# Altium PCB KUOZHAN.PCBDOC (part 9 of 21)
Units mm, origin at the board's own origin, x right, y up, seen from the top; angles counter-clockwise.
Board outline 165.51 x 116.38 mm, 2 copper layers (Top Layer, Bottom Layer); 171 components, 245 nets, 894 pads, 298 vias.
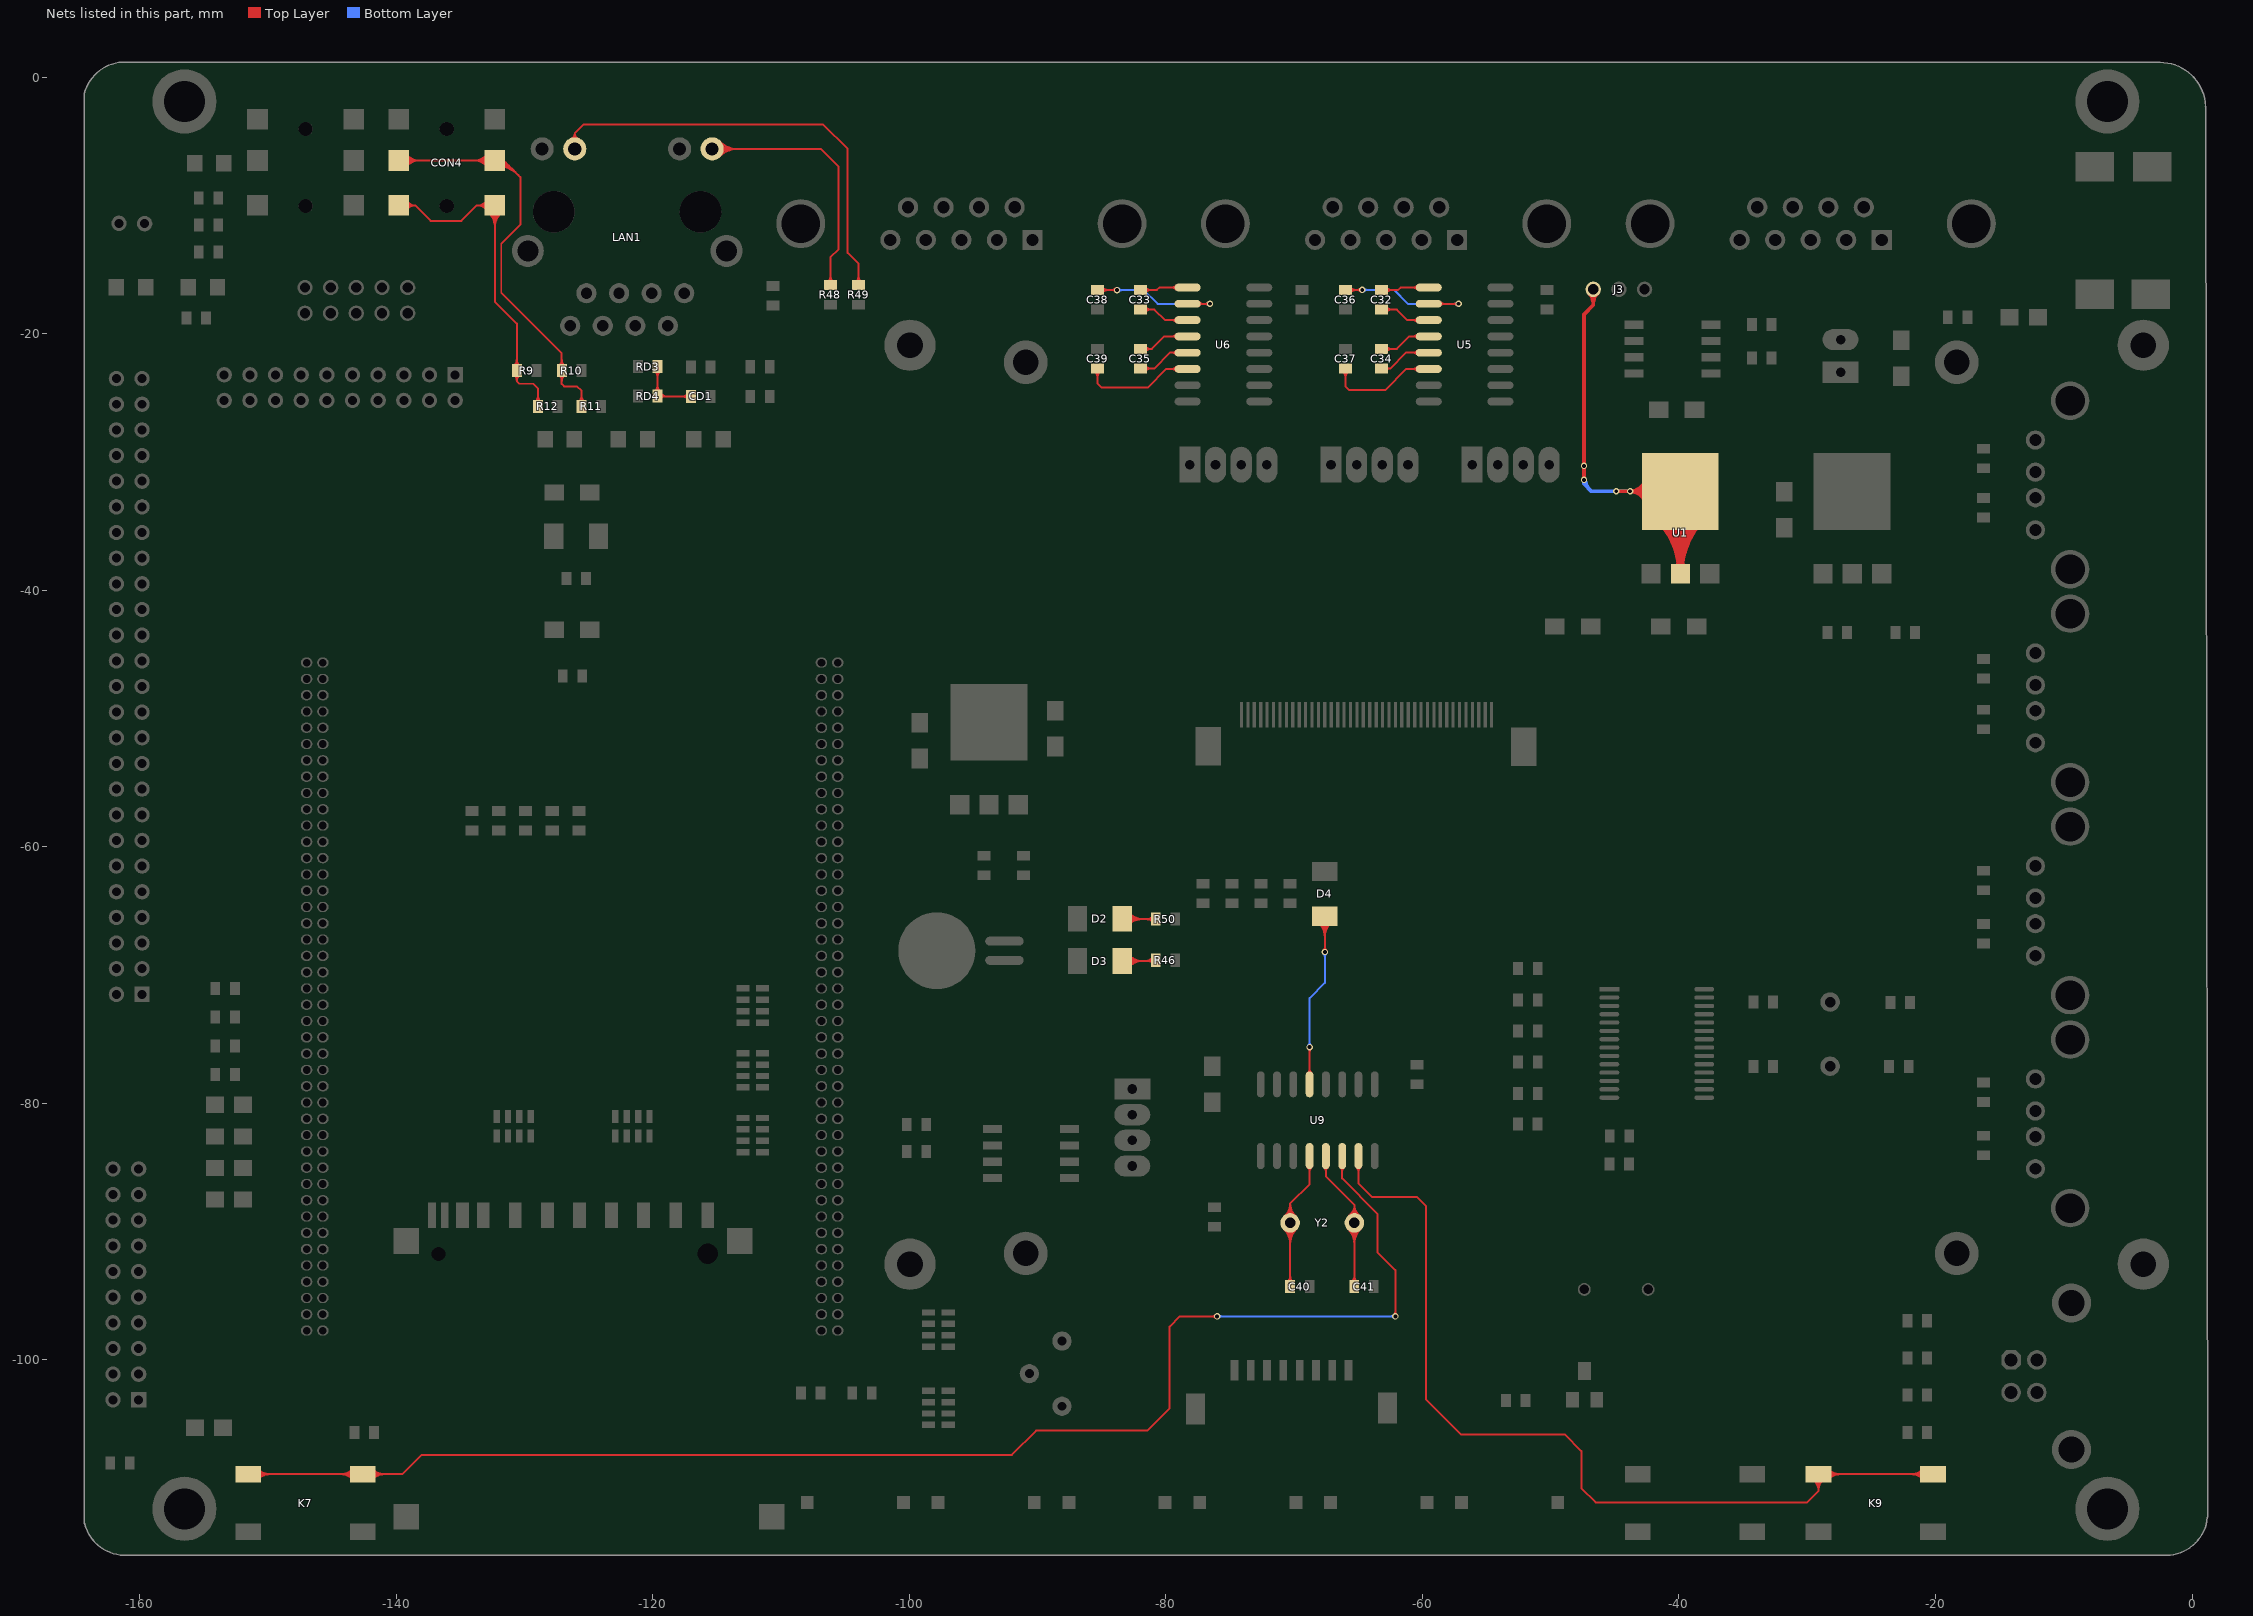
[diagram p9: the nets of this part, all layers, seen from the top]

## Via types
v1: diameter 0.5, hole 0.3, Top Layer to Bottom Layer, 272 vias
v2: diameter 0.6, hole 0.3, Top Layer to Bottom Layer, 24 vias
v3: diameter 0.9, hole 0.9, Top Layer to Bottom Layer, 2 vias

## Nets (pads, with @x,y where several pads share a name; then routed paths per layer and width w, separated by ;. In a path a pad name is that pad's centre, name@x,y a point inside that pad or via, vN(x,y) a via of type N, cw(c..) or ccw(c..) an arc to the next point about the centre after c; other vN are vias at no path point) (continued)
NetC32_1: C32.1 U5.1 | length 13.9
  Top Layer w0.15: C32.1@-63.183,-16.59 -61.89,-16.59 -61.7,-16.4 U5.1@-59.5,-16.4 ; C32.1@-62.84,-16.807 cw(c-62.318,-17.329) -62.318,-16.59 ; C32.1@-62.84,-16.807 cw(c-62.318,-17.329) -62.318,-16.59 ; C32.1@-62.84,-16.807 cw(c-62.318,-17.329) -62.318,-16.59 ; C32.1@-62.84,-16.807 cw(c-62.318,-17.329) -62.318,-16.59 ; C32.1@-62.84,-16.807 cw(c-62.318,-17.329) -62.318,-16.59 ; C32.1@-62.84,-16.374 ccw(c-62.318,-15.851) -62.318,-16.59 ; C32.1@-62.84,-16.374 ccw(c-62.318,-15.851) -62.318,-16.59 ; C32.1@-62.84,-16.374 ccw(c-62.318,-15.851) -62.318,-16.59 ; C32.1@-62.84,-16.374 ccw(c-62.318,-15.851) -62.318,-16.59 ; C32.1@-62.84,-16.374 ccw(c-62.318,-15.851) -62.318,-16.59 ; -60.766,-16.4 cw(c-60.766,-16.955) U5.1@-60.374,-16.562 ; -60.766,-16.4 ccw(c-60.766,-15.845) U5.1@-60.374,-16.238 ; -60.766,-16.4 cw(c-60.766,-16.955) U5.1@-60.374,-16.562 ; -60.766,-16.4 ccw(c-60.766,-15.845) U5.1@-60.374,-16.238 ; -60.766,-16.4 cw(c-60.766,-16.955) U5.1@-60.374,-16.562 ; -60.766,-16.4 ccw(c-60.766,-15.845) U5.1@-60.374,-16.238 ; -60.766,-16.4 cw(c-60.766,-16.955) U5.1@-60.374,-16.562 ; -60.766,-16.4 ccw(c-60.766,-15.845) U5.1@-60.374,-16.238 ; -60.766,-16.4 ccw(c-60.766,-15.845) U5.1@-60.374,-16.238 ; -60.766,-16.4 cw(c-60.766,-16.955) U5.1@-60.374,-16.562
NetC32_2: C32.2 U5.3 | length 14.2
  Top Layer w0.15: C32.2@-63.183,-18.114 -61.986,-18.114 -61.16,-18.94 U5.3@-59.5,-18.94 ; C32.2@-62.84,-18.331 cw(c-62.318,-18.853) -62.318,-18.114 ; C32.2@-62.84,-18.331 cw(c-62.318,-18.853) -62.318,-18.114 ; C32.2@-62.84,-18.331 cw(c-62.318,-18.853) -62.318,-18.114 ; C32.2@-62.84,-18.331 cw(c-62.318,-18.853) -62.318,-18.114 ; C32.2@-62.84,-18.331 cw(c-62.318,-18.853) -62.318,-18.114 ; C32.2@-62.84,-17.898 ccw(c-62.318,-17.375) -62.318,-18.114 ; C32.2@-62.84,-17.898 ccw(c-62.318,-17.375) -62.318,-18.114 ; C32.2@-62.84,-17.898 ccw(c-62.318,-17.375) -62.318,-18.114 ; C32.2@-62.84,-17.898 ccw(c-62.318,-17.375) -62.318,-18.114 ; C32.2@-62.84,-17.898 ccw(c-62.318,-17.375) -62.318,-18.114 ; -60.766,-18.94 cw(c-60.766,-19.495) U5.3@-60.374,-19.102 ; -60.766,-18.94 ccw(c-60.766,-18.385) U5.3@-60.374,-18.778 ; -60.766,-18.94 cw(c-60.766,-19.495) U5.3@-60.374,-19.102 ; -60.766,-18.94 ccw(c-60.766,-18.385) U5.3@-60.374,-18.778 ; -60.766,-18.94 cw(c-60.766,-19.495) U5.3@-60.374,-19.102 ; -60.766,-18.94 ccw(c-60.766,-18.385) U5.3@-60.374,-18.778 ; -60.766,-18.94 cw(c-60.766,-19.495) U5.3@-60.374,-19.102 ; -60.766,-18.94 ccw(c-60.766,-18.385) U5.3@-60.374,-18.778 ; -60.766,-18.94 ccw(c-60.766,-18.385) U5.3@-60.374,-18.778 ; -60.766,-18.94 cw(c-60.766,-19.495) U5.3@-60.374,-19.102
NetC33_1: C33.1 U6.1 | length 13.9
  Top Layer w0.15: C33.1@-81.983,-16.59 -80.69,-16.59 -80.5,-16.4 U6.1@-78.3,-16.4 ; C33.1@-81.64,-16.807 cw(c-81.118,-17.329) -81.118,-16.59 ; C33.1@-81.64,-16.807 cw(c-81.118,-17.329) -81.118,-16.59 ; C33.1@-81.64,-16.807 cw(c-81.118,-17.329) -81.118,-16.59 ; C33.1@-81.64,-16.807 cw(c-81.118,-17.329) -81.118,-16.59 ; C33.1@-81.64,-16.807 cw(c-81.118,-17.329) -81.118,-16.59 ; C33.1@-81.64,-16.374 ccw(c-81.118,-15.851) -81.118,-16.59 ; C33.1@-81.64,-16.374 ccw(c-81.118,-15.851) -81.118,-16.59 ; C33.1@-81.64,-16.374 ccw(c-81.118,-15.851) -81.118,-16.59 ; C33.1@-81.64,-16.374 ccw(c-81.118,-15.851) -81.118,-16.59 ; C33.1@-81.64,-16.374 ccw(c-81.118,-15.851) -81.118,-16.59 ; -79.566,-16.4 cw(c-79.566,-16.955) U6.1@-79.174,-16.562 ; -79.566,-16.4 ccw(c-79.566,-15.845) U6.1@-79.174,-16.238 ; -79.566,-16.4 cw(c-79.566,-16.955) U6.1@-79.174,-16.562 ; -79.566,-16.4 ccw(c-79.566,-15.845) U6.1@-79.174,-16.238 ; -79.566,-16.4 cw(c-79.566,-16.955) U6.1@-79.174,-16.562 ; -79.566,-16.4 ccw(c-79.566,-15.845) U6.1@-79.174,-16.238 ; -79.566,-16.4 cw(c-79.566,-16.955) U6.1@-79.174,-16.562 ; -79.566,-16.4 ccw(c-79.566,-15.845) U6.1@-79.174,-16.238 ; -79.566,-16.4 ccw(c-79.566,-15.845) U6.1@-79.174,-16.238 ; -79.566,-16.4 cw(c-79.566,-16.955) U6.1@-79.174,-16.562
NetC33_2: C33.2 U6.3 | length 14.2
  Top Layer w0.15: C33.2@-81.983,-18.114 -80.886,-18.114 -80.06,-18.94 U6.3@-78.3,-18.94 ; C33.2@-81.64,-18.331 cw(c-81.118,-18.853) -81.118,-18.114 ; C33.2@-81.64,-18.331 cw(c-81.118,-18.853) -81.118,-18.114 ; C33.2@-81.64,-18.331 cw(c-81.118,-18.853) -81.118,-18.114 ; C33.2@-81.64,-18.331 cw(c-81.118,-18.853) -81.118,-18.114 ; C33.2@-81.64,-18.331 cw(c-81.118,-18.853) -81.118,-18.114 ; C33.2@-81.64,-17.898 ccw(c-81.118,-17.375) -81.118,-18.114 ; C33.2@-81.64,-17.898 ccw(c-81.118,-17.375) -81.118,-18.114 ; C33.2@-81.64,-17.898 ccw(c-81.118,-17.375) -81.118,-18.114 ; C33.2@-81.64,-17.898 ccw(c-81.118,-17.375) -81.118,-18.114 ; C33.2@-81.64,-17.898 ccw(c-81.118,-17.375) -81.118,-18.114 ; -79.566,-18.94 cw(c-79.566,-19.495) U6.3@-79.174,-19.102 ; -79.566,-18.94 ccw(c-79.566,-18.385) U6.3@-79.174,-18.778 ; -79.566,-18.94 cw(c-79.566,-19.495) U6.3@-79.174,-19.102 ; -79.566,-18.94 ccw(c-79.566,-18.385) U6.3@-79.174,-18.778 ; -79.566,-18.94 cw(c-79.566,-19.495) U6.3@-79.174,-19.102 ; -79.566,-18.94 ccw(c-79.566,-18.385) U6.3@-79.174,-18.778 ; -79.566,-18.94 cw(c-79.566,-19.495) U6.3@-79.174,-19.102 ; -79.566,-18.94 ccw(c-79.566,-18.385) U6.3@-79.174,-18.778 ; -79.566,-18.94 ccw(c-79.566,-18.385) U6.3@-79.174,-18.778 ; -79.566,-18.94 cw(c-79.566,-19.495) U6.3@-79.174,-19.102
NetC34_1: C34.1 U5.4 | length 14.2
  Top Layer w0.15: C34.1@-63.183,-21.19 -61.99,-21.19 -61.01,-20.21 U5.4@-59.5,-20.21 ; C34.1@-62.84,-21.407 cw(c-62.318,-21.929) -62.318,-21.19 ; C34.1@-62.84,-21.407 cw(c-62.318,-21.929) -62.318,-21.19 ; C34.1@-62.84,-21.407 cw(c-62.318,-21.929) -62.318,-21.19 ; C34.1@-62.84,-21.407 cw(c-62.318,-21.929) -62.318,-21.19 ; C34.1@-62.84,-21.407 cw(c-62.318,-21.929) -62.318,-21.19 ; C34.1@-62.84,-20.974 ccw(c-62.318,-20.451) -62.318,-21.19 ; C34.1@-62.84,-20.974 ccw(c-62.318,-20.451) -62.318,-21.19 ; C34.1@-62.84,-20.974 ccw(c-62.318,-20.451) -62.318,-21.19 ; C34.1@-62.84,-20.974 ccw(c-62.318,-20.451) -62.318,-21.19 ; C34.1@-62.84,-20.974 ccw(c-62.318,-20.451) -62.318,-21.19 ; -60.766,-20.21 cw(c-60.766,-20.765) U5.4@-60.374,-20.372 ; -60.766,-20.21 ccw(c-60.766,-19.655) U5.4@-60.374,-20.048 ; -60.766,-20.21 cw(c-60.766,-20.765) U5.4@-60.374,-20.372 ; -60.766,-20.21 ccw(c-60.766,-19.655) U5.4@-60.374,-20.048 ; -60.766,-20.21 cw(c-60.766,-20.765) U5.4@-60.374,-20.372 ; -60.766,-20.21 ccw(c-60.766,-19.655) U5.4@-60.374,-20.048 ; -60.766,-20.21 cw(c-60.766,-20.765) U5.4@-60.374,-20.372 ; -60.766,-20.21 ccw(c-60.766,-19.655) U5.4@-60.374,-20.048 ; -60.766,-20.21 ccw(c-60.766,-19.655) U5.4@-60.374,-20.048 ; -60.766,-20.21 cw(c-60.766,-20.765) U5.4@-60.374,-20.372
NetC34_2: C34.2 U5.5 | length 11.9
  Top Layer w0.15: C34.2@-63.183,-22.714 -62.514,-22.714 ; U5.5@-59.5,-21.48 -61.28,-21.48 -62.514,-22.714 ; C34.2@-62.794,-22.872 cw(c-62.514,-23.042) -62.514,-22.714 ; C34.2@-62.794,-22.872 cw(c-62.514,-23.042) -62.514,-22.714 ; C34.2@-62.794,-22.872 cw(c-62.514,-23.042) -62.514,-22.714 ; C34.2@-62.794,-22.872 cw(c-62.514,-23.042) -62.514,-22.714 ; C34.2@-62.794,-22.872 cw(c-62.514,-23.042) -62.514,-22.714 ; C34.2@-62.794,-22.556 ccw(c-62.514,-22.387) -62.514,-22.714 ; C34.2@-62.794,-22.556 ccw(c-62.514,-22.387) -62.514,-22.714 ; C34.2@-62.794,-22.556 ccw(c-62.514,-22.387) -62.514,-22.714 ; C34.2@-62.794,-22.556 ccw(c-62.514,-22.387) -62.514,-22.714 ; C34.2@-62.794,-22.556 ccw(c-62.514,-22.387) -62.514,-22.714 ; -60.766,-21.48 cw(c-60.766,-22.035) U5.5@-60.374,-21.642 ; -60.766,-21.48 ccw(c-60.766,-20.925) U5.5@-60.374,-21.318 ; -60.766,-21.48 cw(c-60.766,-22.035) U5.5@-60.374,-21.642 ; -60.766,-21.48 ccw(c-60.766,-20.925) U5.5@-60.374,-21.318 ; -60.766,-21.48 cw(c-60.766,-22.035) U5.5@-60.374,-21.642 ; -60.766,-21.48 ccw(c-60.766,-20.925) U5.5@-60.374,-21.318 ; -60.766,-21.48 cw(c-60.766,-22.035) U5.5@-60.374,-21.642 ; -60.766,-21.48 ccw(c-60.766,-20.925) U5.5@-60.374,-21.318 ; -60.766,-21.48 ccw(c-60.766,-20.925) U5.5@-60.374,-21.318 ; -60.766,-21.48 cw(c-60.766,-22.035) U5.5@-60.374,-21.642
NetC35_1: C35.1 U6.4 | length 14.2
  Top Layer w0.15: C35.1@-81.983,-21.19 -81.09,-21.19 -80.11,-20.21 U6.4@-78.3,-20.21 ; C35.1@-81.64,-21.407 cw(c-81.118,-21.929) -81.118,-21.19 ; C35.1@-81.64,-21.407 cw(c-81.118,-21.929) -81.118,-21.19 ; C35.1@-81.64,-21.407 cw(c-81.118,-21.929) -81.118,-21.19 ; C35.1@-81.64,-21.407 cw(c-81.118,-21.929) -81.118,-21.19 ; C35.1@-81.64,-21.407 cw(c-81.118,-21.929) -81.118,-21.19 ; C35.1@-81.64,-20.974 ccw(c-81.118,-20.451) -81.118,-21.19 ; C35.1@-81.64,-20.974 ccw(c-81.118,-20.451) -81.118,-21.19 ; C35.1@-81.64,-20.974 ccw(c-81.118,-20.451) -81.118,-21.19 ; C35.1@-81.64,-20.974 ccw(c-81.118,-20.451) -81.118,-21.19 ; C35.1@-81.64,-20.974 ccw(c-81.118,-20.451) -81.118,-21.19 ; -79.566,-20.21 cw(c-79.566,-20.765) U6.4@-79.174,-20.372 ; -79.566,-20.21 ccw(c-79.566,-19.655) U6.4@-79.174,-20.048 ; -79.566,-20.21 cw(c-79.566,-20.765) U6.4@-79.174,-20.372 ; -79.566,-20.21 ccw(c-79.566,-19.655) U6.4@-79.174,-20.048 ; -79.566,-20.21 cw(c-79.566,-20.765) U6.4@-79.174,-20.372 ; -79.566,-20.21 ccw(c-79.566,-19.655) U6.4@-79.174,-20.048 ; -79.566,-20.21 cw(c-79.566,-20.765) U6.4@-79.174,-20.372 ; -79.566,-20.21 ccw(c-79.566,-19.655) U6.4@-79.174,-20.048 ; -79.566,-20.21 ccw(c-79.566,-19.655) U6.4@-79.174,-20.048 ; -79.566,-20.21 cw(c-79.566,-20.765) U6.4@-79.174,-20.372
NetC35_2: C35.2 U6.5 | length 14.4
  Top Layer w0.15: C35.2@-81.983,-22.714 -80.914,-22.714 -79.68,-21.48 U6.5@-78.3,-21.48 ; C35.2@-81.64,-22.931 cw(c-81.118,-23.453) -81.118,-22.714 ; C35.2@-81.64,-22.931 cw(c-81.118,-23.453) -81.118,-22.714 ; C35.2@-81.64,-22.931 cw(c-81.118,-23.453) -81.118,-22.714 ; C35.2@-81.64,-22.931 cw(c-81.118,-23.453) -81.118,-22.714 ; C35.2@-81.64,-22.931 cw(c-81.118,-23.453) -81.118,-22.714 ; C35.2@-81.64,-22.498 ccw(c-81.118,-21.975) -81.118,-22.714 ; C35.2@-81.64,-22.498 ccw(c-81.118,-21.975) -81.118,-22.714 ; C35.2@-81.64,-22.498 ccw(c-81.118,-21.975) -81.118,-22.714 ; C35.2@-81.64,-22.498 ccw(c-81.118,-21.975) -81.118,-22.714 ; C35.2@-81.64,-22.498 ccw(c-81.118,-21.975) -81.118,-22.714 ; -79.566,-21.48 cw(c-79.566,-22.035) U6.5@-79.174,-21.642 ; -79.566,-21.48 ccw(c-79.566,-20.925) U6.5@-79.174,-21.318 ; -79.566,-21.48 cw(c-79.566,-22.035) U6.5@-79.174,-21.642 ; -79.566,-21.48 ccw(c-79.566,-20.925) U6.5@-79.174,-21.318 ; -79.566,-21.48 cw(c-79.566,-22.035) U6.5@-79.174,-21.642 ; -79.566,-21.48 ccw(c-79.566,-20.925) U6.5@-79.174,-21.318 ; -79.566,-21.48 cw(c-79.566,-22.035) U6.5@-79.174,-21.642 ; -79.566,-21.48 ccw(c-79.566,-20.925) U6.5@-79.174,-21.318 ; -79.566,-21.48 ccw(c-79.566,-20.925) U6.5@-79.174,-21.318 ; -79.566,-21.48 cw(c-79.566,-22.035) U6.5@-79.174,-21.642
NetC36_1: C36.1 U5.2 | length 34.4
  Top Layer w0.15: C36.1@-65.983,-16.59 v1(-64.69,-16.59) ; v1@-64.779,-16.679 ccw(c-64.992,-16.892) -64.992,-16.59 ccw(c-64.992,-16.288) v1@-64.779,-16.502 ; U5.2@-59.43,-17.6 U5.2@-59.5,-17.67 v1(-57.17,-17.67) ; v1@-57.258,-17.758 ccw(c-57.472,-17.972) -57.472,-17.67 ccw(c-57.472,-17.368) v1@-57.258,-17.582 ; C36.1@-65.64,-16.807 cw(c-65.118,-17.329) -65.118,-16.59 ; C36.1@-65.64,-16.807 cw(c-65.118,-17.329) -65.118,-16.59 ; C36.1@-65.64,-16.807 cw(c-65.118,-17.329) -65.118,-16.59 ; C36.1@-65.64,-16.807 cw(c-65.118,-17.329) -65.118,-16.59 ; C36.1@-65.64,-16.807 cw(c-65.118,-17.329) -65.118,-16.59 ; C36.1@-65.64,-16.374 ccw(c-65.118,-15.851) -65.118,-16.59 ; C36.1@-65.64,-16.374 ccw(c-65.118,-15.851) -65.118,-16.59 ; C36.1@-65.64,-16.374 ccw(c-65.118,-15.851) -65.118,-16.59 ; C36.1@-65.64,-16.374 ccw(c-65.118,-15.851) -65.118,-16.59 ; C36.1@-65.64,-16.374 ccw(c-65.118,-15.851) -65.118,-16.59 ; -65.113,-16.59 cw(c-65.113,-17.013) v1@-64.814,-16.714 ; -65.113,-16.59 ccw(c-65.113,-16.168) v1@-64.814,-16.466 ; -65.113,-16.59 cw(c-65.113,-17.013) v1@-64.814,-16.714 ; -65.113,-16.59 ccw(c-65.113,-16.168) v1@-64.814,-16.466 ; -65.113,-16.59 cw(c-65.113,-17.013) v1@-64.814,-16.714 ; -65.113,-16.59 ccw(c-65.113,-16.168) v1@-64.814,-16.466 ; -65.113,-16.59 ccw(c-65.113,-16.168) v1@-64.814,-16.466 ; -65.113,-16.59 cw(c-65.113,-17.013) v1@-64.814,-16.714 ; U5.2@-58.626,-17.832 cw(c-58.234,-18.225) -58.234,-17.67 ; U5.2@-58.626,-17.832 cw(c-58.234,-18.225) -58.234,-17.67 ; U5.2@-58.626,-17.832 cw(c-58.234,-18.225) -58.234,-17.67 ; U5.2@-58.626,-17.832 cw(c-58.234,-18.225) -58.234,-17.67 ; U5.2@-58.626,-17.832 cw(c-58.234,-18.225) -58.234,-17.67 ; U5.2@-58.626,-17.508 ccw(c-58.234,-17.115) -58.234,-17.67 ; U5.2@-58.626,-17.508 ccw(c-58.234,-17.115) -58.234,-17.67 ; U5.2@-58.626,-17.508 ccw(c-58.234,-17.115) -58.234,-17.67 ; U5.2@-58.626,-17.508 ccw(c-58.234,-17.115) -58.234,-17.67 ; U5.2@-58.626,-17.508 ccw(c-58.234,-17.115) -58.234,-17.67 ; -57.592,-17.67 cw(c-57.592,-18.092) v1@-57.294,-17.794 ; -57.592,-17.67 ccw(c-57.592,-17.248) v1@-57.294,-17.546 ; -57.592,-17.67 cw(c-57.592,-18.092) v1@-57.294,-17.794 ; -57.592,-17.67 ccw(c-57.592,-17.248) v1@-57.294,-17.546 ; -57.592,-17.67 cw(c-57.592,-18.092) v1@-57.294,-17.794 ; -57.592,-17.67 ccw(c-57.592,-17.248) v1@-57.294,-17.546 ; -57.592,-17.67 ccw(c-57.592,-17.248) v1@-57.294,-17.546 ; -57.592,-17.67 cw(c-57.592,-18.092) v1@-57.294,-17.794
  Bottom Layer w0.15: v1(-64.69,-16.59) -62.21,-16.59 -61.13,-17.67 v1(-57.17,-17.67) ; v1@-64.602,-16.679 cw(c-64.388,-16.892) -64.388,-16.59 cw(c-64.388,-16.288) v1@-64.602,-16.502 ; v1@-57.258,-17.758 ccw(c-57.472,-17.972) -57.472,-17.67 ccw(c-57.472,-17.368) v1@-57.258,-17.582 ; v1@-64.566,-16.714 cw(c-64.268,-17.013) -64.268,-16.59 ; v1@-64.566,-16.714 cw(c-64.268,-17.013) -64.268,-16.59 ; v1@-64.566,-16.714 cw(c-64.268,-17.013) -64.268,-16.59 ; v1@-64.566,-16.714 cw(c-64.268,-17.013) -64.268,-16.59 ; v1@-64.566,-16.466 ccw(c-64.268,-16.168) -64.268,-16.59 ; v1@-64.566,-16.466 ccw(c-64.268,-16.168) -64.268,-16.59 ; v1@-64.566,-16.466 ccw(c-64.268,-16.168) -64.268,-16.59 ; v1@-64.566,-16.466 ccw(c-64.268,-16.168) -64.268,-16.59 ; -57.592,-17.67 cw(c-57.592,-18.092) v1@-57.294,-17.794 ; -57.592,-17.67 ccw(c-57.592,-17.248) v1@-57.294,-17.546 ; -57.592,-17.67 cw(c-57.592,-18.092) v1@-57.294,-17.794 ; -57.592,-17.67 ccw(c-57.592,-17.248) v1@-57.294,-17.546 ; -57.592,-17.67 cw(c-57.592,-18.092) v1@-57.294,-17.794 ; -57.592,-17.67 ccw(c-57.592,-17.248) v1@-57.294,-17.546 ; -57.592,-17.67 ccw(c-57.592,-17.248) v1@-57.294,-17.546 ; -57.592,-17.67 cw(c-57.592,-18.092) v1@-57.294,-17.794
NetC37_1: C37.1 U5.6 | length 18.8
  Top Layer w0.15: C37.1@-65.983,-22.72 -65.983,-24.117 -65.7,-24.4 -62.9,-24.4 -61.25,-22.75 U5.6@-59.5,-22.75 ; C37.1@-66.2,-22.937 cw(c-66.722,-23.459) -65.983,-23.459 ; C37.1@-66.2,-22.937 cw(c-66.722,-23.459) -65.983,-23.459 ; C37.1@-66.2,-22.937 cw(c-66.722,-23.459) -65.983,-23.459 ; C37.1@-66.2,-22.937 cw(c-66.722,-23.459) -65.983,-23.459 ; C37.1@-66.2,-22.937 cw(c-66.722,-23.459) -65.983,-23.459 ; -65.983,-23.459 cw(c-65.245,-23.459) C37.1@-65.767,-22.937 ; -65.983,-23.459 cw(c-65.245,-23.459) C37.1@-65.767,-22.937 ; -65.983,-23.459 cw(c-65.245,-23.459) C37.1@-65.767,-22.937 ; -65.983,-23.459 cw(c-65.245,-23.459) C37.1@-65.767,-22.937 ; -65.983,-23.459 cw(c-65.245,-23.459) C37.1@-65.767,-22.937 ; -60.766,-22.75 cw(c-60.766,-23.305) U5.6@-60.374,-22.912 ; -60.766,-22.75 ccw(c-60.766,-22.195) U5.6@-60.374,-22.588 ; -60.766,-22.75 cw(c-60.766,-23.305) U5.6@-60.374,-22.912 ; -60.766,-22.75 ccw(c-60.766,-22.195) U5.6@-60.374,-22.588 ; -60.766,-22.75 cw(c-60.766,-23.305) U5.6@-60.374,-22.912 ; -60.766,-22.75 ccw(c-60.766,-22.195) U5.6@-60.374,-22.588 ; -60.766,-22.75 cw(c-60.766,-23.305) U5.6@-60.374,-22.912 ; -60.766,-22.75 ccw(c-60.766,-22.195) U5.6@-60.374,-22.588 ; -60.766,-22.75 ccw(c-60.766,-22.195) U5.6@-60.374,-22.588 ; -60.766,-22.75 cw(c-60.766,-23.305) U5.6@-60.374,-22.912
NetC38_1: C38.1 U6.2 | length 33.6
  Top Layer w0.15: C38.1@-85.317,-16.59 v1@-83.89,-16.59 ; -84.126,-16.59 cw(c-84.126,-16.926) v1@-83.888,-16.688 ; -84.078,-16.59 ccw(c-84.078,-16.322) v1@-83.888,-16.512 ; U6.2@-78.3,-17.67 v1@-76.53,-17.67 ; v1@-76.638,-17.758 ccw(c-76.852,-17.972) -76.852,-17.67 ccw(c-76.852,-17.368) v1@-76.638,-17.582 ; C38.1@-84.973,-16.807 cw(c-84.451,-17.329) -84.451,-16.59 ; C38.1@-84.973,-16.807 cw(c-84.451,-17.329) -84.451,-16.59 ; C38.1@-84.973,-16.807 cw(c-84.451,-17.329) -84.451,-16.59 ; C38.1@-84.973,-16.807 cw(c-84.451,-17.329) -84.451,-16.59 ; C38.1@-84.973,-16.807 cw(c-84.451,-17.329) -84.451,-16.59 ; C38.1@-84.973,-16.374 ccw(c-84.451,-15.851) -84.451,-16.59 ; C38.1@-84.973,-16.374 ccw(c-84.451,-15.851) -84.451,-16.59 ; C38.1@-84.973,-16.374 ccw(c-84.451,-15.851) -84.451,-16.59 ; C38.1@-84.973,-16.374 ccw(c-84.451,-15.851) -84.451,-16.59 ; C38.1@-84.973,-16.374 ccw(c-84.451,-15.851) -84.451,-16.59 ; -84.246,-16.59 cw(c-84.246,-17.046) v1@-83.924,-16.724 ; -84.246,-16.59 cw(c-84.246,-17.046) v1@-83.924,-16.724 ; -84.246,-16.59 cw(c-84.246,-17.046) v1@-83.924,-16.724 ; -84.246,-16.59 cw(c-84.246,-17.046) v1@-83.924,-16.724 ; -84.199,-16.59 ccw(c-84.199,-16.201) v1@-83.924,-16.476 ; -84.199,-16.59 ccw(c-84.199,-16.201) v1@-83.924,-16.476 ; -84.199,-16.59 ccw(c-84.199,-16.201) v1@-83.924,-16.476 ; -84.199,-16.59 ccw(c-84.199,-16.201) v1@-83.924,-16.476 ; U6.2@-77.426,-17.832 cw(c-77.034,-18.225) -77.034,-17.67 ; U6.2@-77.426,-17.832 cw(c-77.034,-18.225) -77.034,-17.67 ; U6.2@-77.426,-17.832 cw(c-77.034,-18.225) -77.034,-17.67 ; U6.2@-77.426,-17.832 cw(c-77.034,-18.225) -77.034,-17.67 ; U6.2@-77.426,-17.832 cw(c-77.034,-18.225) -77.034,-17.67 ; U6.2@-77.426,-17.508 ccw(c-77.034,-17.115) -77.034,-17.67 ; U6.2@-77.426,-17.508 ccw(c-77.034,-17.115) -77.034,-17.67 ; U6.2@-77.426,-17.508 ccw(c-77.034,-17.115) -77.034,-17.67 ; U6.2@-77.426,-17.508 ccw(c-77.034,-17.115) -77.034,-17.67 ; U6.2@-77.426,-17.508 ccw(c-77.034,-17.115) -77.034,-17.67 ; -76.972,-17.67 cw(c-76.972,-18.092) v1@-76.674,-17.794 ; -76.972,-17.67 ccw(c-76.972,-17.248) v1@-76.674,-17.546 ; -76.972,-17.67 cw(c-76.972,-18.092) v1@-76.674,-17.794 ; -76.972,-17.67 ccw(c-76.972,-17.248) v1@-76.674,-17.546 ; -76.972,-17.67 cw(c-76.972,-18.092) v1@-76.674,-17.794 ; -76.972,-17.67 ccw(c-76.972,-17.248) v1@-76.674,-17.546 ; -76.972,-17.67 ccw(c-76.972,-17.248) v1@-76.674,-17.546 ; -76.972,-17.67 cw(c-76.972,-18.092) v1@-76.674,-17.794
  Bottom Layer w0.15: v1(-83.8,-16.6) -81.7,-16.6 -80.63,-17.67 v1(-76.55,-17.67) ; v1@-83.712,-16.688 cw(c-83.498,-16.902) -83.498,-16.6 cw(c-83.498,-16.298) v1@-83.712,-16.512 ; v1@-76.638,-17.758 ccw(c-76.852,-17.972) -76.852,-17.67 ccw(c-76.852,-17.368) v1@-76.638,-17.582 ; v1@-83.676,-16.724 cw(c-83.378,-17.022) -83.378,-16.6 ; v1@-83.676,-16.724 cw(c-83.378,-17.022) -83.378,-16.6 ; v1@-83.676,-16.724 cw(c-83.378,-17.022) -83.378,-16.6 ; v1@-83.676,-16.724 cw(c-83.378,-17.022) -83.378,-16.6 ; v1@-83.676,-16.476 ccw(c-83.378,-16.178) -83.378,-16.6 ; v1@-83.676,-16.476 ccw(c-83.378,-16.178) -83.378,-16.6 ; v1@-83.676,-16.476 ccw(c-83.378,-16.178) -83.378,-16.6 ; v1@-83.676,-16.476 ccw(c-83.378,-16.178) -83.378,-16.6 ; -76.972,-17.67 cw(c-76.972,-18.092) v1@-76.674,-17.794 ; -76.972,-17.67 ccw(c-76.972,-17.248) v1@-76.674,-17.546 ; -76.972,-17.67 cw(c-76.972,-18.092) v1@-76.674,-17.794 ; -76.972,-17.67 ccw(c-76.972,-17.248) v1@-76.674,-17.546 ; -76.972,-17.67 cw(c-76.972,-18.092) v1@-76.674,-17.794 ; -76.972,-17.67 ccw(c-76.972,-17.248) v1@-76.674,-17.546 ; -76.972,-17.67 ccw(c-76.972,-17.248) v1@-76.674,-17.546 ; -76.972,-17.67 cw(c-76.972,-18.092) v1@-76.674,-17.794
NetC39_1: C39.1 U6.6 | length 19.1
  Top Layer w0.15: C39.1@-85.317,-22.72 -85.317,-23.883 -85,-24.2 -81.4,-24.2 -79.95,-22.75 U6.6@-78.3,-22.75 ; C39.1@-85.533,-22.937 cw(c-86.055,-23.459) -85.317,-23.459 ; C39.1@-85.533,-22.937 cw(c-86.055,-23.459) -85.317,-23.459 ; C39.1@-85.533,-22.937 cw(c-86.055,-23.459) -85.317,-23.459 ; C39.1@-85.533,-22.937 cw(c-86.055,-23.459) -85.317,-23.459 ; C39.1@-85.533,-22.937 cw(c-86.055,-23.459) -85.317,-23.459 ; -85.317,-23.459 cw(c-84.578,-23.459) C39.1@-85.1,-22.937 ; -85.317,-23.459 cw(c-84.578,-23.459) C39.1@-85.1,-22.937 ; -85.317,-23.459 cw(c-84.578,-23.459) C39.1@-85.1,-22.937 ; -85.317,-23.459 cw(c-84.578,-23.459) C39.1@-85.1,-22.937 ; -85.317,-23.459 cw(c-84.578,-23.459) C39.1@-85.1,-22.937 ; -79.566,-22.75 cw(c-79.566,-23.305) U6.6@-79.174,-22.912 ; -79.566,-22.75 ccw(c-79.566,-22.195) U6.6@-79.174,-22.588 ; -79.566,-22.75 cw(c-79.566,-23.305) U6.6@-79.174,-22.912 ; -79.566,-22.75 ccw(c-79.566,-22.195) U6.6@-79.174,-22.588 ; -79.566,-22.75 cw(c-79.566,-23.305) U6.6@-79.174,-22.912 ; -79.566,-22.75 ccw(c-79.566,-22.195) U6.6@-79.174,-22.588 ; -79.566,-22.75 cw(c-79.566,-23.305) U6.6@-79.174,-22.912 ; -79.566,-22.75 ccw(c-79.566,-22.195) U6.6@-79.174,-22.588 ; -79.566,-22.75 ccw(c-79.566,-22.195) U6.6@-79.174,-22.588 ; -79.566,-22.75 cw(c-79.566,-23.305) U6.6@-79.174,-22.912
NetC40_1: C40.1 U9.4 Y2.2 | length 24.5
  Top Layer w0.15: Y2.2@-70.787,-89.794 cw(c-71.96,-90.967) -70.301,-90.967 cw(c-68.643,-90.967) Y2.2@-69.815,-89.794 ; Y2.2@-70.752,-88.79 ccw(c-71.61,-87.801) -70.301,-87.801 ; Y2.2@-70.681,-89.688 cw(c-71.598,-90.605) -70.301,-90.605 cw(c-69.005,-90.605) Y2.2@-69.921,-89.688 ; Y2.2@-70.653,-88.903 ccw(c-71.325,-88.13) -70.301,-88.13 ccw(c-69.278,-88.13) Y2.2@-69.949,-88.903 ; Y2.2@-70.575,-89.582 cw(c-71.236,-90.243) -70.301,-90.243 cw(c-69.367,-90.243) Y2.2@-70.028,-89.582 ; Y2.2@-70.555,-89.016 ccw(c-71.039,-88.459) -70.301,-88.459 ccw(c-69.564,-88.459) Y2.2@-70.047,-89.016 ; C40.1@-70.526,-93.94 ccw(c-71.07,-93.397) -70.301,-93.397 ; C40.1@-70.42,-94.046 ccw(c-70.707,-93.759) -70.301,-93.759 ; C40.1@-70.301,-94.275 Y2.2@-70.301,-89.308 -70.301,-87.801 ; -70.301,-93.439 ccw(c-69.592,-93.439) C40.1@-70.093,-93.94 ; Y2.2@-69.851,-88.79 cw(c-68.992,-87.801) -70.301,-87.801 ; U9.4@-68.952,-84.974 cw(c-69.345,-85.366) -68.79,-85.366 cw(c-68.235,-85.366) U9.4@-68.628,-84.974 ; U9.4@-68.79,-84.1 -68.79,-86.29 -70.301,-87.801
  Top Layer w0.3: C40.1@-70.31,-94.283 C40.1@-70.301,-94.275
NetC41_1: C41.1 U9.5 Y2.1 | length 24.2
  Top Layer w0.15: U9.5@-67.682,-84.974 cw(c-68.075,-85.366) -67.52,-85.366 cw(c-66.965,-85.366) U9.5@-67.358,-84.974 ; U9.5@-67.52,-84.1 -67.52,-85.68 -65.297,-87.903 Y2.1@-65.297,-89.308 C41.1@-65.297,-94.271 ; Y2.1@-65.783,-89.794 cw(c-66.956,-90.967) -65.297,-90.967 cw(c-63.639,-90.967) Y2.1@-64.812,-89.794 ; Y2.1@-65.719,-88.766 ccw(c-66.392,-87.903) -65.297,-87.903 ccw(c-64.203,-87.903) Y2.1@-64.875,-88.766 ; Y2.1@-65.677,-89.688 cw(c-66.594,-90.605) -65.297,-90.605 cw(c-64.001,-90.605) Y2.1@-64.918,-89.688 ; Y2.1@-65.627,-88.884 ccw(c-66.153,-88.21) -65.297,-88.21 ccw(c-64.442,-88.21) Y2.1@-64.968,-88.884 ; Y2.1@-65.571,-89.582 cw(c-66.232,-90.243) -65.297,-90.243 cw(c-64.363,-90.243) Y2.1@-65.024,-89.582 ; Y2.1@-65.535,-89.003 ccw(c-65.914,-88.516) -65.297,-88.516 ccw(c-64.681,-88.516) Y2.1@-65.06,-89.003 ; C41.1@-65.526,-93.94 ccw(c-66.079,-93.388) -65.297,-93.388 ; C41.1@-65.42,-94.046 ccw(c-65.717,-93.75) -65.297,-93.75 ; -65.297,-93.448 ccw(c-64.601,-93.448) C41.1@-65.093,-93.94
  Top Layer w0.3: C41.1@-65.31,-94.283 C41.1@-65.297,-94.271
NetCD1_1: CD1.1 RD3.1 RD4.1 | length 29.9
  Top Layer w0.15: RD4.1@-119.613,-24.86 RD3.1@-119.613,-22.56 ; RD4.1@-119.589,-24.883 CD1.1@-117.01,-24.883 ; RD4.1@-119.829,-24.516 ccw(c-120.351,-23.994) -119.613,-23.994 ; RD4.1@-119.829,-24.516 ccw(c-120.351,-23.994) -119.613,-23.994 ; RD4.1@-119.829,-24.516 ccw(c-120.351,-23.994) -119.613,-23.994 ; RD4.1@-119.829,-24.516 ccw(c-120.351,-23.994) -119.613,-23.994 ; RD4.1@-119.829,-24.516 ccw(c-120.351,-23.994) -119.613,-23.994 ; RD3.1@-119.829,-22.903 cw(c-120.351,-23.425) -119.613,-23.425 ; RD3.1@-119.829,-22.903 cw(c-120.351,-23.425) -119.613,-23.425 ; RD3.1@-119.829,-22.903 cw(c-120.351,-23.425) -119.613,-23.425 ; RD3.1@-119.829,-22.903 cw(c-120.351,-23.425) -119.613,-23.425 ; RD3.1@-119.829,-22.903 cw(c-120.351,-23.425) -119.613,-23.425 ; -119.613,-23.994 ccw(c-118.874,-23.994) RD4.1@-119.396,-24.516 ; -119.613,-23.994 ccw(c-118.874,-23.994) RD4.1@-119.396,-24.516 ; -119.613,-23.994 ccw(c-118.874,-23.994) RD4.1@-119.396,-24.516 ; -119.613,-23.994 ccw(c-118.874,-23.994) RD4.1@-119.396,-24.516 ; -119.613,-23.994 ccw(c-118.874,-23.994) RD4.1@-119.396,-24.516 ; -119.613,-23.425 cw(c-118.874,-23.425) RD3.1@-119.396,-22.903 ; -119.613,-23.425 cw(c-118.874,-23.425) RD3.1@-119.396,-22.903 ; -119.613,-23.425 cw(c-118.874,-23.425) RD3.1@-119.396,-22.903 ; -119.613,-23.425 cw(c-118.874,-23.425) RD3.1@-119.396,-22.903 ; -119.613,-23.425 cw(c-118.874,-23.425) RD3.1@-119.396,-22.903 ; RD4.1@-119.502,-24.749 ccw(c-119.179,-24.426) -119.179,-24.883 ; RD4.1@-119.502,-24.749 ccw(c-119.179,-24.426) -119.179,-24.883 ; RD4.1@-119.502,-24.749 ccw(c-119.179,-24.426) -119.179,-24.883 ; RD4.1@-119.502,-24.749 ccw(c-119.179,-24.426) -119.179,-24.883 ; RD4.1@-119.502,-24.749 ccw(c-119.179,-24.426) -119.179,-24.883 ; RD4.1@-119.396,-25.076 cw(c-118.931,-25.541) -118.931,-24.883 ; RD4.1@-119.396,-25.076 cw(c-118.931,-25.541) -118.931,-24.883 ; RD4.1@-119.396,-25.076 cw(c-118.931,-25.541) -118.931,-24.883 ; RD4.1@-119.396,-25.076 cw(c-118.931,-25.541) -118.931,-24.883 ; RD4.1@-119.396,-25.076 cw(c-118.931,-25.541) -118.931,-24.883 ; RD4.1@-119.396,-24.643 ccw(c-118.816,-24.063) -118.816,-24.883 ; RD4.1@-119.396,-24.643 ccw(c-118.816,-24.063) -118.816,-24.883 ; RD4.1@-119.396,-24.643 ccw(c-118.816,-24.063) -118.816,-24.883 ; RD4.1@-119.396,-24.643 ccw(c-118.816,-24.063) -118.816,-24.883 ; RD4.1@-119.396,-24.643 ccw(c-118.816,-24.063) -118.816,-24.883 ; -117.749,-24.883 cw(c-117.749,-25.622) CD1.1@-117.226,-25.1 ; -117.749,-24.883 ccw(c-117.749,-24.145) CD1.1@-117.226,-24.667 ; -117.749,-24.883 cw(c-117.749,-25.622) CD1.1@-117.226,-25.1 ; -117.749,-24.883 ccw(c-117.749,-24.145) CD1.1@-117.226,-24.667 ; -117.749,-24.883 cw(c-117.749,-25.622) CD1.1@-117.226,-25.1 ; -117.749,-24.883 ccw(c-117.749,-24.145) CD1.1@-117.226,-24.667 ; -117.749,-24.883 cw(c-117.749,-25.622) CD1.1@-117.226,-25.1 ; -117.749,-24.883 ccw(c-117.749,-24.145) CD1.1@-117.226,-24.667 ; -117.749,-24.883 ccw(c-117.749,-24.145) CD1.1@-117.226,-24.667 ; -117.749,-24.883 cw(c-117.749,-25.622) CD1.1@-117.226,-25.1
NetCON4_3: CON4.3 CON4.4 R10.1 R11.2 | length 70.3
  Top Layer w0.15: CON4.3@-139.8,-6.5 CON4.4@-132.292,-6.5 -131.6,-6.5 -130.3,-7.8 -130.3,-11.5 -131.8,-13 -131.8,-16.8 -127.087,-21.513 -127.087,-22.84 -127.087,-23.913 -126.9,-24.1 -125.9,-24.1 -125.537,-24.463 R11.2@-125.537,-25.66 ; CON4.3@-139.499,-6.801 cw(c-138.774,-7.526) -138.774,-6.5 cw(c-138.774,-5.474) CON4.3@-139.499,-6.199 ; CON4.3@-139.393,-6.907 cw(c-138.412,-7.888) -138.412,-6.5 cw(c-138.412,-5.112) CON4.3@-139.393,-6.093 ; CON4.3@-139.287,-7.013 cw(c-138.05,-8.25) -138.05,-6.5 cw(c-138.05,-4.75) CON4.3@-139.287,-5.987 ; CON4.4@-132.805,-7.013 ccw(c-134.042,-8.25) -134.042,-6.5 ccw(c-134.042,-4.75) CON4.4@-132.805,-5.987 ; CON4.4@-132.699,-6.907 ccw(c-133.68,-7.888) -133.68,-6.5 ccw(c-133.68,-5.112) CON4.4@-132.699,-6.093 ; CON4.4@-132.593,-6.801 ccw(c-133.318,-7.526) -133.318,-6.5 ccw(c-133.318,-5.474) CON4.4@-132.593,-6.199 ; CON4.4@-132.297,-6.325 cw(c-132.263,-7.503) -131.43,-6.67 ; CON4.4@-132.293,-6.475 cw(c-132.25,-7.981) -131.184,-6.916 ; CON4.4@-132.288,-6.625 cw(c-132.236,-8.459) -130.938,-7.162 ; CON4.4@-132.284,-6.775 cw(c-132.222,-8.938) -130.692,-7.408 ; CON4.4@-132.28,-6.925 cw(c-132.209,-9.416) -130.446,-7.654 ; R10.1@-127.291,-23.224 cw(c-127.783,-23.716) -127.087,-23.716 ; R10.1@-127.291,-22.537 ccw(c-127.783,-22.045) -127.087,-22.045 ; -127.087,-23.777 cw(c-126.306,-23.777) R10.1@-126.858,-23.224 ; -127.087,-23.415 cw(c-126.668,-23.415) R10.1@-126.964,-23.118 ; -127.087,-22.347 ccw(c-126.668,-22.347) R10.1@-126.964,-22.643 ; -127.087,-21.985 ccw(c-126.306,-21.985) R10.1@-126.858,-22.537 ; R10.1@-127.304,-23.184 cw(c-127.826,-23.706) -127.087,-23.706 ; R10.1@-127.304,-23.184 cw(c-127.826,-23.706) -127.087,-23.706 ; R10.1@-127.304,-23.184 cw(c-127.826,-23.706) -127.087,-23.706 ; R10.1@-127.304,-23.184 cw(c-127.826,-23.706) -127.087,-23.706 ; R10.1@-127.304,-22.497 ccw(c-127.826,-21.975) -127.087,-21.975 ; R10.1@-127.304,-22.497 ccw(c-127.826,-21.975) -127.087,-21.975 ; R10.1@-127.304,-22.497 ccw(c-127.826,-21.975) -127.087,-21.975 ; R10.1@-127.304,-22.497 ccw(c-127.826,-21.975) -127.087,-21.975 ; -127.087,-23.706 cw(c-126.349,-23.706) R10.1@-126.871,-23.184 ; -127.087,-23.706 cw(c-126.349,-23.706) R10.1@-126.871,-23.184 ; -127.087,-23.706 cw(c-126.349,-23.706) R10.1@-126.871,-23.184 ; -127.087,-23.706 cw(c-126.349,-23.706) R10.1@-126.871,-23.184 ; -127.087,-21.975 ccw(c-126.349,-21.975) R10.1@-126.871,-22.497 ; -127.087,-21.975 ccw(c-126.349,-21.975) R10.1@-126.871,-22.497 ; -127.087,-21.975 ccw(c-126.349,-21.975) R10.1@-126.871,-22.497 ; -127.087,-21.975 ccw(c-126.349,-21.975) R10.1@-126.871,-22.497 ; R11.2@-125.753,-25.316 ccw(c-126.275,-24.794) -125.537,-24.794 ; R11.2@-125.753,-25.316 ccw(c-126.275,-24.794) -125.537,-24.794 ; R11.2@-125.753,-25.316 ccw(c-126.275,-24.794) -125.537,-24.794 ; R11.2@-125.753,-25.316 ccw(c-126.275,-24.794) -125.537,-24.794 ; R11.2@-125.753,-25.316 ccw(c-126.275,-24.794) -125.537,-24.794 ; -125.537,-24.794 ccw(c-124.798,-24.794) R11.2@-125.32,-25.316 ; -125.537,-24.794 ccw(c-124.798,-24.794) R11.2@-125.32,-25.316 ; -125.537,-24.794 ccw(c-124.798,-24.794) R11.2@-125.32,-25.316 ; -125.537,-24.794 ccw(c-124.798,-24.794) R11.2@-125.32,-25.316 ; -125.537,-24.794 ccw(c-124.798,-24.794) R11.2@-125.32,-25.316
NetCON4_5: CON4.5 CON4.6 R9.1 R12.2 | length 57.3
  Top Layer w0.15: CON4.5@-139.8,-10 -138.5,-10 ; CON4.5@-139.311,-10.302 cw(c-138.769,-10.637) -138.769,-10 cw(c-138.769,-9.363) CON4.5@-139.311,-9.698 ; CON4.5@-139.183,-10.381 cw(c-138.5,-10.803) -138.5,-10 ; CON4.5@-139.183,-9.619 ccw(c-138.5,-9.197) -138.5,-10 ; CON4.6@-132.882,-10.421 ccw(c-133.7,-11.005) -133.7,-10 ; CON4.6@-132.882,-9.579 cw(c-133.7,-8.995) -133.7,-10 ; CON4.6@-132.805,-10.513 cw(c-134.042,-11.75) -132.292,-11.75 cw(c-130.542,-11.75) CON4.6@-131.779,-10.513 ; CON4.6@-132.76,-10.334 ccw(c-133.409,-10.797) -133.409,-10 ccw(c-133.409,-9.203) CON4.6@-132.76,-9.666 ; CON4.6@-132.699,-10.407 cw(c-133.68,-11.388) -132.292,-11.388 cw(c-130.904,-11.388) CON4.6@-131.885,-10.407 ; CON4.6@-132.638,-10.247 ccw(c-133.117,-10.589) -133.117,-10 ccw(c-133.117,-9.411) CON4.6@-132.638,-9.753 ; CON4.6@-132.593,-10.301 cw(c-133.318,-11.026) -132.292,-11.026 cw(c-131.266,-11.026) CON4.6@-131.991,-10.301 ; CON4.6@-132.292,-10.6 -132.292,-17.508 -130.587,-19.213 -130.587,-22.84 -130.587,-23.713 ; CON4.6@-132.292,-10 -133.7,-10 ; R9.1@-130.791,-22.537 ccw(c-131.283,-22.045) -130.587,-22.045 ; R9.1@-130.79,-23.225 cw(c-131.275,-23.713) -130.587,-23.713 ; -130.587,-22.347 ccw(c-130.168,-22.347) R9.1@-130.464,-22.643 ; -130.587,-21.985 ccw(c-129.806,-21.985) R9.1@-130.358,-22.537 ; R9.1@-130.373,-23.237 ccw(c-129.954,-23.713) -130.587,-23.713 ; R12.2@-128.937,-25.66 -128.937,-24.263 -129.3,-23.9 -130.4,-23.9 -130.587,-23.713 ; -138.5,-10 -137.3,-11.2 -134.9,-11.2 -133.7,-10 ; R9.1@-130.804,-23.184 cw(c-131.326,-23.706) -130.587,-23.706 ; R9.1@-130.804,-23.184 cw(c-131.326,-23.706) -130.587,-23.706 ; R9.1@-130.804,-23.184 cw(c-131.326,-23.706) -130.587,-23.706 ; R9.1@-130.804,-23.184 cw(c-131.326,-23.706) -130.587,-23.706 ; R9.1@-130.804,-22.497 ccw(c-131.326,-21.975) -130.587,-21.975 ; R9.1@-130.804,-22.497 ccw(c-131.326,-21.975) -130.587,-21.975 ; R9.1@-130.804,-22.497 ccw(c-131.326,-21.975) -130.587,-21.975 ; R9.1@-130.804,-22.497 ccw(c-131.326,-21.975) -130.587,-21.975 ; -130.587,-23.706 cw(c-129.849,-23.706) R9.1@-130.371,-23.184 ; -130.587,-23.706 cw(c-129.849,-23.706) R9.1@-130.371,-23.184 ; -130.587,-23.706 cw(c-129.849,-23.706) R9.1@-130.371,-23.184 ; -130.587,-23.706 cw(c-129.849,-23.706) R9.1@-130.371,-23.184 ; -130.587,-21.975 ccw(c-129.849,-21.975) R9.1@-130.371,-22.497 ; -130.587,-21.975 ccw(c-129.849,-21.975) R9.1@-130.371,-22.497 ; -130.587,-21.975 ccw(c-129.849,-21.975) R9.1@-130.371,-22.497 ; -130.587,-21.975 ccw(c-129.849,-21.975) R9.1@-130.371,-22.497 ; R12.2@-129.153,-25.316 ccw(c-129.675,-24.794) -128.937,-24.794 ; R12.2@-129.153,-25.316 ccw(c-129.675,-24.794) -128.937,-24.794 ; R12.2@-129.153,-25.316 ccw(c-129.675,-24.794) -128.937,-24.794 ; R12.2@-129.153,-25.316 ccw(c-129.675,-24.794) -128.937,-24.794 ; R12.2@-129.153,-25.316 ccw(c-129.675,-24.794) -128.937,-24.794 ; -128.937,-24.794 ccw(c-128.198,-24.794) R12.2@-128.72,-25.316 ; -128.937,-24.794 ccw(c-128.198,-24.794) R12.2@-128.72,-25.316 ; -128.937,-24.794 ccw(c-128.198,-24.794) R12.2@-128.72,-25.316 ; -128.937,-24.794 ccw(c-128.198,-24.794) R12.2@-128.72,-25.316 ; -128.937,-24.794 ccw(c-128.198,-24.794) R12.2@-128.72,-25.316
NetD2_1: D2.1 R50.1 | length 9.7
  Top Layer w0.15: D2.1@-83.385,-65.601 -83.346,-65.64 R50.1@-80.787,-65.64 ; D2.1@-83.12,-65.866 cw(c-82.576,-66.41) -82.576,-65.64 ; D2.1@-83.12,-65.335 ccw(c-82.384,-64.599) -82.384,-65.64 ; D2.1@-83.014,-65.972 cw(c-82.214,-66.772) -82.214,-65.64 ; D2.1@-83.014,-65.229 ccw(c-82.022,-64.237) -82.022,-65.64 ; D2.1@-82.908,-66.078 cw(c-81.852,-67.134) -81.852,-65.64 ; D2.1@-82.908,-65.123 ccw(c-81.66,-63.875) -81.66,-65.64 ; R50.1@-81.004,-65.857 ccw(c-81.526,-66.379) -81.526,-65.64 ccw(c-81.526,-64.902) R50.1@-81.004,-65.424
NetD3_2: D3.2 R46.1 | length 10.2
  Top Layer w0.15: D3.2@-83.385,-68.899 -80.846,-68.899 R46.1@-80.787,-68.84 ; D3.2@-83.12,-69.165 cw(c-82.48,-69.805) -82.48,-68.899 cw(c-82.48,-67.994) D3.2@-83.12,-68.634 ; D3.2@-83.014,-69.271 cw(c-82.118,-70.167) -82.118,-68.899 cw(c-82.118,-67.632) D3.2@-83.014,-68.528 ; D3.2@-82.908,-69.377 cw(c-81.756,-70.529) -81.756,-68.899 cw(c-81.756,-67.27) D3.2@-82.908,-68.422 ; -81.669,-68.899 ccw(c-81.669,-67.959) R46.1@-81.004,-68.624 ; -81.384,-68.899 cw(c-81.384,-69.437) R46.1@-81.004,-69.057 ; -81.306,-68.899 ccw(c-81.306,-68.321) R46.1@-80.898,-68.73
NetD4_2: D4.2 U9.13 | length 23.2
  Top Layer w0.15: U9.13@-68.952,-77.638 ccw(c-69.345,-77.246) -68.79,-77.246 ccw(c-68.235,-77.246) U9.13@-68.628,-77.638 ; v1@-68.914,-75.734 cw(c-69.212,-76.032) -68.79,-76.032 cw(c-68.368,-76.032) v1@-68.666,-75.734 ; U9.13@-68.79,-78.512 v1(-68.79,-75.61) ; D4.2@-68.077,-65.892 cw(c-69.229,-67.044) -67.599,-67.044 cw(c-65.97,-67.044) D4.2@-67.122,-65.892 ; D4.2@-67.971,-65.786 cw(c-68.867,-66.682) -67.599,-66.682 cw(c-66.332,-66.682) D4.2@-67.228,-65.786 ; D4.2@-67.865,-65.68 cw(c-68.505,-66.32) -67.599,-66.32 cw(c-66.694,-66.32) D4.2@-67.334,-65.68 ; v1@-67.723,-68.076 ccw(c-68.022,-67.778) -67.599,-67.778 ccw(c-67.177,-67.778) v1@-67.476,-68.076 ; v1@-67.599,-68.299 D4.2@-67.599,-65.415
  Bottom Layer w0.15: v1@-68.914,-75.486 ccw(c-69.212,-75.188) -68.79,-75.188 ccw(c-68.368,-75.188) v1@-68.666,-75.486 ; v1(-68.79,-75.61) -68.79,-71.79 -67.599,-70.599 v1(-67.599,-68.2) ; v1@-67.723,-68.324 cw(c-68.022,-68.622) -67.599,-68.622 cw(c-67.177,-68.622) v1@-67.476,-68.324
NetJ3_1: J3.1 U1.3 U1.4 | length 217.5
  Top Layer w0.3: v1(-47.4,-31.4) v1(-47.4,-30.3) -47.4,-18.5 -46.677,-17.777 J3.1@-46.677,-16.545 ; v1(-44.887,-32.287) v1(-43.8,-32.287) ; U1.4@-39.897,-32.287 v1(-43.8,-32.287) ; J3.1@-46.995,-16.864 cw(c-47.763,-17.632) -46.677,-17.632 ; J3.1@-46.995,-16.864 cw(c-47.763,-17.632) -46.677,-17.632 ; J3.1@-46.995,-16.864 cw(c-47.763,-17.632) -46.677,-17.632 ; J3.1@-46.995,-16.864 cw(c-47.763,-17.632) -46.677,-17.632 ; J3.1@-46.995,-16.864 cw(c-47.763,-17.632) -46.677,-17.632 ; -46.677,-17.632 cw(c-45.59,-17.632) J3.1@-46.358,-16.864 ; -46.677,-17.632 cw(c-45.59,-17.632) J3.1@-46.358,-16.864 ; -46.677,-17.632 cw(c-45.59,-17.632) J3.1@-46.358,-16.864 ; -46.677,-17.632 cw(c-45.59,-17.632) J3.1@-46.358,-16.864 ; -46.677,-17.632 cw(c-45.59,-17.632) J3.1@-46.358,-16.864 ; v1(-43.8,-32.287) cw(c-43.8,-33.535) U1.4@-42.611,-33.155 ; v1(-43.8,-32.287) ccw(c-43.8,-31.039) U1.4@-42.611,-31.419 ; v1(-43.8,-32.287) cw(c-43.8,-33.535) U1.4@-42.611,-33.155 ; v1(-43.8,-32.287) ccw(c-43.8,-31.039) U1.4@-42.611,-31.419 ; v1(-43.8,-32.287) cw(c-43.8,-33.535) U1.4@-42.611,-33.155 ; v1(-43.8,-32.287) ccw(c-43.8,-31.039) U1.4@-42.611,-31.419 ; v1(-43.8,-32.287) cw(c-43.8,-33.535) U1.4@-42.611,-33.155 ; v1(-43.8,-32.287) ccw(c-43.8,-31.039) U1.4@-42.611,-31.419 ; v1(-43.8,-32.287) ccw(c-43.8,-31.039) U1.4@-42.611,-31.419 ; v1(-43.8,-32.287) cw(c-43.8,-33.535) U1.4@-42.611,-33.155 ; -43.389,-32.287 cw(c-43.389,-33.403) U1.4@-42.326,-33.063 ; -43.389,-32.287 ccw(c-43.389,-31.171) U1.4@-42.326,-31.511 ; -43.389,-32.287 cw(c-43.389,-33.403) U1.4@-42.326,-33.063 ; -43.389,-32.287 ccw(c-43.389,-31.171) U1.4@-42.326,-31.511 ; -43.389,-32.287 cw(c-43.389,-33.403) U1.4@-42.326,-33.063 ; -43.389,-32.287 ccw(c-43.389,-31.171) U1.4@-42.326,-31.511 ; -43.389,-32.287 cw(c-43.389,-33.403) U1.4@-42.326,-33.063 ; -43.389,-32.287 ccw(c-43.389,-31.171) U1.4@-42.326,-31.511 ; -43.389,-32.287 ccw(c-43.389,-31.171) U1.4@-42.326,-31.511 ; -43.389,-32.287 cw(c-43.389,-33.403) U1.4@-42.326,-33.063 ; -42.978,-32.287 cw(c-42.978,-33.272) U1.4@-42.04,-32.972 ; -42.978,-32.287 ccw(c-42.978,-31.302) U1.4@-42.04,-31.602 ; -42.978,-32.287 cw(c-42.978,-33.272) U1.4@-42.04,-32.972 ; -42.978,-32.287 ccw(c-42.978,-31.302) U1.4@-42.04,-31.602 ; -42.978,-32.287 cw(c-42.978,-33.272) U1.4@-42.04,-32.972 ; -42.978,-32.287 ccw(c-42.978,-31.302) U1.4@-42.04,-31.602 ; -42.978,-32.287 cw(c-42.978,-33.272) U1.4@-42.04,-32.972 ; -42.978,-32.287 ccw(c-42.978,-31.302) U1.4@-42.04,-31.602 ; -42.978,-32.287 ccw(c-42.978,-31.302) U1.4@-42.04,-31.602 ; -42.978,-32.287 cw(c-42.978,-33.272) U1.4@-42.04,-32.972
  Top Layer w0.5: U1.3@-39.883,-38.712 U1.4@-39.883,-32.301 ; U1.4@-41.788,-34.284 cw(c-45.982,-38.712) U1.3@-39.883,-38.712 ; U1.4@-41.788,-34.284 cw(c-45.982,-38.712) U1.3@-39.883,-38.712 ; U1.4@-41.788,-34.284 cw(c-45.982,-38.712) U1.3@-39.883,-38.712 ; U1.4@-41.788,-34.284 cw(c-45.982,-38.712) U1.3@-39.883,-38.712 ; U1.4@-41.788,-34.284 cw(c-45.982,-38.712) U1.3@-39.883,-38.712 ; U1.4@-41.444,-33.921 cw(c-44.881,-37.549) -39.883,-37.549 ; U1.4@-41.444,-33.921 cw(c-44.881,-37.549) -39.883,-37.549 ; U1.4@-41.444,-33.921 cw(c-44.881,-37.549) -39.883,-37.549 ; U1.4@-41.444,-33.921 cw(c-44.881,-37.549) -39.883,-37.549 ; U1.4@-41.444,-33.921 cw(c-44.881,-37.549) -39.883,-37.549 ; U1.4@-41.1,-33.558 cw(c-43.78,-36.387) -39.883,-36.387 ; U1.4@-41.1,-33.558 cw(c-43.78,-36.387) -39.883,-36.387 ; U1.4@-41.1,-33.558 cw(c-43.78,-36.387) -39.883,-36.387 ; U1.4@-41.1,-33.558 cw(c-43.78,-36.387) -39.883,-36.387 ; U1.4@-41.1,-33.558 cw(c-43.78,-36.387) -39.883,-36.387 ; U1.3@-40.236,-38.358 ccw(c-41.09,-37.505) -39.883,-37.505 ; U1.3@-40.236,-38.358 ccw(c-41.09,-37.505) -39.883,-37.505 ; U1.3@-40.236,-38.358 ccw(c-41.09,-37.505) -39.883,-37.505 ; U1.3@-40.236,-38.358 ccw(c-41.09,-37.505) -39.883,-37.505 ; U1.3@-40.236,-38.358 ccw(c-41.09,-37.505) -39.883,-37.505 ; U1.3@-39.883,-38.712 cw(c-33.721,-38.712) U1.4@-37.991,-34.27 ; U1.3@-39.883,-38.712 cw(c-33.721,-38.712) U1.4@-37.991,-34.27 ; U1.3@-39.883,-38.712 cw(c-33.721,-38.712) U1.4@-37.991,-34.27 ; U1.3@-39.883,-38.712 cw(c-33.721,-38.712) U1.4@-37.991,-34.27 ; U1.3@-39.883,-38.712 cw(c-33.721,-38.712) U1.4@-37.991,-34.27 ; -39.883,-37.538 cw(c-34.85,-37.538) U1.4@-38.338,-33.909 ; -39.883,-37.538 cw(c-34.85,-37.538) U1.4@-38.338,-33.909 ; -39.883,-37.538 cw(c-34.85,-37.538) U1.4@-38.338,-33.909 ; -39.883,-37.538 cw(c-34.85,-37.538) U1.4@-38.338,-33.909 ; -39.883,-37.538 cw(c-34.85,-37.538) U1.4@-38.338,-33.909 ; -39.883,-37.505 ccw(c-38.676,-37.505) U1.3@-39.529,-38.358 ; -39.883,-37.505 ccw(c-38.676,-37.505) U1.3@-39.529,-38.358 ; -39.883,-37.505 ccw(c-38.676,-37.505) U1.3@-39.529,-38.358 ; -39.883,-37.505 ccw(c-38.676,-37.505) U1.3@-39.529,-38.358 ; -39.883,-37.505 ccw(c-38.676,-37.505) U1.3@-39.529,-38.358 ; -39.883,-36.364 cw(c-35.979,-36.364) U1.4@-38.684,-33.549 ; -39.883,-36.364 cw(c-35.979,-36.364) U1.4@-38.684,-33.549 ; -39.883,-36.364 cw(c-35.979,-36.364) U1.4@-38.684,-33.549 ; -39.883,-36.364 cw(c-35.979,-36.364) U1.4@-38.684,-33.549 ; -39.883,-36.364 cw(c-35.979,-36.364) U1.4@-38.684,-33.549
  Bottom Layer w0.3: v1(-47.4,-30.3) v1(-47.4,-31.4) -47.4,-31.7 -46.813,-32.287 v1(-44.887,-32.287) v1(-43.8,-32.287) ; v1@-47.35,-31.4 ccw(c-46.505,-31.4) -47.102,-31.998 ; v1@-47.3,-31.4 ccw(c-46.334,-31.4) -47.017,-32.083 ; v1@-47.3,-31.4 ccw(c-46.334,-31.4) -47.017,-32.083 ; v1@-47.3,-31.4 ccw(c-46.334,-31.4) -47.017,-32.083 ; v1@-47.3,-31.4 ccw(c-46.334,-31.4) -47.017,-32.083
NetK7_3: K7.3 K7.4 U9.6 | length 130.5
  Top Layer w0.15: K7.3@-151.525,-108.9 K7.4@-142.6,-108.9 -139.5,-108.9 -138,-107.4 -92,-107.4 -90.1,-105.5 -81.434,-105.5 -79.7,-103.766 -79.7,-97.4 -78.9,-96.6 v1(-76,-96.6) ; K7.3@-150.981,-109.094 cw(c-150.511,-109.564) -150.511,-108.9 cw(c-150.511,-108.236) K7.3@-150.981,-108.705 ; K7.3@-150.875,-109.2 cw(c-150.149,-109.926) -150.149,-108.9 cw(c-150.149,-107.874) K7.3@-150.875,-108.599 ; K7.3@-150.769,-109.306 cw(c-149.787,-110.288) -149.787,-108.9 cw(c-149.787,-107.512) K7.3@-150.769,-108.493 ; K7.4@-143.357,-109.306 ccw(c-144.338,-110.288) -144.338,-108.9 ccw(c-144.338,-107.512) K7.4@-143.357,-108.493 ; K7.4@-143.251,-109.2 ccw(c-143.976,-109.926) -143.976,-108.9 ccw(c-143.976,-107.874) K7.4@-143.251,-108.599 ; K7.4@-143.144,-109.094 ccw(c-143.614,-109.564) -143.614,-108.9 ccw(c-143.614,-108.236) K7.4@-143.144,-108.705 ; K7.4@-142.056,-109.094 cw(c-141.586,-109.564) -141.586,-108.9 cw(c-141.586,-108.236) K7.4@-142.056,-108.705 ; K7.4@-141.949,-109.2 cw(c-141.224,-109.926) -141.224,-108.9 cw(c-141.224,-107.874) K7.4@-141.949,-108.599 ; K7.4@-141.843,-109.306 cw(c-140.862,-110.288) -140.862,-108.9 cw(c-140.862,-107.512) K7.4@-141.843,-108.493 ; v1@-76.124,-96.724 ccw(c-76.422,-97.022) -76.422,-96.6 ccw(c-76.422,-96.178) v1@-76.124,-96.476 ; U9.6@-66.412,-84.974 cw(c-66.805,-85.366) -66.25,-85.366 cw(c-65.695,-85.366) U9.6@-66.088,-84.974 ; U9.6@-66.25,-84.1 -66.25,-85.85 -63.5,-88.6 -63.5,-91.6 -62.1,-93 v1(-62.1,-96.6) ; v1@-62.224,-96.476 ccw(c-62.522,-96.178) -62.1,-96.178 ccw(c-61.678,-96.178) v1@-61.976,-96.476
  Bottom Layer w0.15: v1(-76,-96.6) v1(-62.1,-96.6) ; v1@-75.876,-96.724 cw(c-75.578,-97.022) -75.578,-96.6 cw(c-75.578,-96.178) v1@-75.876,-96.476 ; v1@-62.224,-96.724 ccw(c-62.522,-97.022) -62.522,-96.6 ccw(c-62.522,-96.178) v1@-62.224,-96.476
NetK9_3: K9.3 K9.4 U9.7 | length 83.5
  Top Layer w0.15: U9.7@-65.142,-84.974 cw(c-65.535,-85.366) -64.98,-85.366 cw(c-64.425,-85.366) U9.7@-64.818,-84.974 ; U9.7@-64.98,-84.1 -64.98,-86.22 -63.9,-87.3 -60.4,-87.3 -59.7,-88 -59.7,-103.1 -57,-105.8 -48.9,-105.8 -47.6,-107.1 -47.6,-110 -46.5,-111.1 -30,-111.1 -29.125,-110.225 ; K9.3@-29.518,-109.32 cw(c-30.365,-110.225) -29.125,-110.225 ; K9.3@-29.416,-109.21 cw(c-30.042,-109.88) -29.125,-109.88 cw(c-28.209,-109.88) K9.3@-28.835,-109.21 ; K9.3@-28.732,-109.32 ccw(c-27.885,-110.225) -29.125,-110.225 ; K9.3@-28.581,-109.094 cw(c-28.111,-109.564) -28.111,-108.9 cw(c-28.111,-108.236) K9.3@-28.581,-108.705 ; K9.3@-28.475,-109.2 cw(c-27.749,-109.926) -27.749,-108.9 cw(c-27.749,-107.874) K9.3@-28.475,-108.599 ; K9.3@-28.369,-109.306 cw(c-27.387,-110.288) -27.387,-108.9 cw(c-27.387,-107.512) K9.3@-28.369,-108.493 ; K9.4@-20.957,-109.306 ccw(c-21.938,-110.288) -21.938,-108.9 ccw(c-21.938,-107.512) K9.4@-20.957,-108.493 ; K9.4@-20.851,-109.2 ccw(c-21.576,-109.926) -21.576,-108.9 ccw(c-21.576,-107.874) K9.4@-20.851,-108.599 ; K9.4@-20.744,-109.094 ccw(c-21.214,-109.564) -21.214,-108.9 ccw(c-21.214,-108.236) K9.4@-20.744,-108.705 ; K9.4@-20.2,-108.9 K9.3@-29.125,-108.9 -29.125,-110.225
NetLAN1_9: LAN1.9 R48.1 | length 71.2
  Top Layer w0.15: LAN1.9@-115.358,-5.594 -106.906,-5.594 -105.5,-7 -105.5,-13.4 -106.14,-14.04 R48.1@-106.14,-16.213 ; LAN1.9@-115.093,-5.859 cw(c-114.453,-6.499) -114.453,-5.594 ; LAN1.9@-115.093,-5.859 cw(c-114.453,-6.499) -114.453,-5.594 ; LAN1.9@-115.093,-5.859 cw(c-114.453,-6.499) -114.453,-5.594 ; LAN1.9@-115.093,-5.859 cw(c-114.453,-6.499) -114.453,-5.594 ; LAN1.9@-115.093,-5.859 cw(c-114.453,-6.499) -114.453,-5.594 ; LAN1.9@-115.093,-5.329 ccw(c-114.453,-4.688) -114.453,-5.594 ; LAN1.9@-115.093,-5.329 ccw(c-114.453,-4.688) -114.453,-5.594 ; LAN1.9@-115.093,-5.329 ccw(c-114.453,-4.688) -114.453,-5.594 ; LAN1.9@-115.093,-5.329 ccw(c-114.453,-4.688) -114.453,-5.594 ; LAN1.9@-115.093,-5.329 ccw(c-114.453,-4.688) -114.453,-5.594 ; LAN1.9@-114.987,-5.965 cw(c-114.091,-6.861) -114.091,-5.594 ; LAN1.9@-114.987,-5.965 cw(c-114.091,-6.861) -114.091,-5.594 ; LAN1.9@-114.987,-5.965 cw(c-114.091,-6.861) -114.091,-5.594 ; LAN1.9@-114.987,-5.965 cw(c-114.091,-6.861) -114.091,-5.594 ; LAN1.9@-114.987,-5.965 cw(c-114.091,-6.861) -114.091,-5.594 ; LAN1.9@-114.987,-5.223 ccw(c-114.091,-4.326) -114.091,-5.594 ; LAN1.9@-114.987,-5.223 ccw(c-114.091,-4.326) -114.091,-5.594 ; LAN1.9@-114.987,-5.223 ccw(c-114.091,-4.326) -114.091,-5.594 ; LAN1.9@-114.987,-5.223 ccw(c-114.091,-4.326) -114.091,-5.594 ; LAN1.9@-114.987,-5.223 ccw(c-114.091,-4.326) -114.091,-5.594 ; LAN1.9@-114.881,-6.071 cw(c-113.728,-7.223) -113.728,-5.594 ; LAN1.9@-114.881,-6.071 cw(c-113.728,-7.223) -113.728,-5.594 ; LAN1.9@-114.881,-6.071 cw(c-113.728,-7.223) -113.728,-5.594 ; LAN1.9@-114.881,-6.071 cw(c-113.728,-7.223) -113.728,-5.594 ; LAN1.9@-114.881,-6.071 cw(c-113.728,-7.223) -113.728,-5.594 ; LAN1.9@-114.881,-5.117 ccw(c-113.728,-3.964) -113.728,-5.594 ; LAN1.9@-114.881,-5.117 ccw(c-113.728,-3.964) -113.728,-5.594 ; LAN1.9@-114.881,-5.117 ccw(c-113.728,-3.964) -113.728,-5.594 ; LAN1.9@-114.881,-5.117 ccw(c-113.728,-3.964) -113.728,-5.594 ; LAN1.9@-114.881,-5.117 ccw(c-113.728,-3.964) -113.728,-5.594 ; LAN1.9@-114.775,-6.177 cw(c-113.366,-7.586) -113.366,-5.594 ; LAN1.9@-114.775,-6.177 cw(c-113.366,-7.586) -113.366,-5.594 ; LAN1.9@-114.775,-6.177 cw(c-113.366,-7.586) -113.366,-5.594 ; LAN1.9@-114.775,-6.177 cw(c-113.366,-7.586) -113.366,-5.594 ; LAN1.9@-114.775,-6.177 cw(c-113.366,-7.586) -113.366,-5.594 ; LAN1.9@-114.775,-5.01 ccw(c-113.366,-3.602) -113.366,-5.594 ; LAN1.9@-114.775,-5.01 ccw(c-113.366,-3.602) -113.366,-5.594 ; LAN1.9@-114.775,-5.01 ccw(c-113.366,-3.602) -113.366,-5.594 ; LAN1.9@-114.775,-5.01 ccw(c-113.366,-3.602) -113.366,-5.594 ; LAN1.9@-114.775,-5.01 ccw(c-113.366,-3.602) -113.366,-5.594 ; R48.1@-106.357,-15.996 ccw(c-106.879,-15.474) -106.14,-15.474 ; R48.1@-106.357,-15.996 ccw(c-106.879,-15.474) -106.14,-15.474 ; R48.1@-106.357,-15.996 ccw(c-106.879,-15.474) -106.14,-15.474 ; R48.1@-106.357,-15.996 ccw(c-106.879,-15.474) -106.14,-15.474 ; R48.1@-106.357,-15.996 ccw(c-106.879,-15.474) -106.14,-15.474 ; -106.14,-15.474 ccw(c-105.402,-15.474) R48.1@-105.924,-15.996 ; -106.14,-15.474 ccw(c-105.402,-15.474) R48.1@-105.924,-15.996 ; -106.14,-15.474 ccw(c-105.402,-15.474) R48.1@-105.924,-15.996 ; -106.14,-15.474 ccw(c-105.402,-15.474) R48.1@-105.924,-15.996 ; -106.14,-15.474 ccw(c-105.402,-15.474) R48.1@-105.924,-15.996
NetLAN1_11: LAN1.11 R49.1 | length 51.1
  Top Layer w0.15: LAN1.11@-126.068,-5.594 -126.068,-4.368 ; R49.1@-103.94,-16.213 -103.94,-14.56 -104.8,-13.7 -104.8,-5.6 -106.7,-3.7 -125.4,-3.7 -126.068,-4.368 ; LAN1.11@-126.379,-4.83 ccw(c-126.566,-4.368) -126.068,-4.368 ; LAN1.11@-126.379,-4.83 ccw(c-126.566,-4.368) -126.068,-4.368 ; LAN1.11@-126.379,-4.83 ccw(c-126.566,-4.368) -126.068,-4.368 ; LAN1.11@-126.379,-4.83 ccw(c-126.566,-4.368) -126.068,-4.368 ; LAN1.11@-126.379,-4.83 ccw(c-126.566,-4.368) -126.068,-4.368 ; LAN1.11@-126.322,-4.968 ccw(c-126.476,-4.591) -126.068,-4.591 ; LAN1.11@-126.322,-4.968 ccw(c-126.476,-4.591) -126.068,-4.591 ; LAN1.11@-126.322,-4.968 ccw(c-126.476,-4.591) -126.068,-4.591 ; LAN1.11@-126.322,-4.968 ccw(c-126.476,-4.591) -126.068,-4.591 ; LAN1.11@-126.322,-4.968 ccw(c-126.476,-4.591) -126.068,-4.591 ; -126.068,-4.591 ccw(c-125.66,-4.591) LAN1.11@-125.814,-4.968 ; -126.068,-4.591 ccw(c-125.66,-4.591) LAN1.11@-125.814,-4.968 ; -126.068,-4.591 ccw(c-125.66,-4.591) LAN1.11@-125.814,-4.968 ; -126.068,-4.591 ccw(c-125.66,-4.591) LAN1.11@-125.814,-4.968 ; -126.068,-4.591 ccw(c-125.66,-4.591) LAN1.11@-125.814,-4.968 ; -126.068,-4.368 ccw(c-125.57,-4.368) LAN1.11@-125.757,-4.83 ; -126.068,-4.368 ccw(c-125.57,-4.368) LAN1.11@-125.757,-4.83 ; -126.068,-4.368 ccw(c-125.57,-4.368) LAN1.11@-125.757,-4.83 ; -126.068,-4.368 ccw(c-125.57,-4.368) LAN1.11@-125.757,-4.83 ; -126.068,-4.368 ccw(c-125.57,-4.368) LAN1.11@-125.757,-4.83 ; R49.1@-104.157,-15.996 ccw(c-104.679,-15.474) -103.94,-15.474 ; R49.1@-104.157,-15.996 ccw(c-104.679,-15.474) -103.94,-15.474 ; R49.1@-104.157,-15.996 ccw(c-104.679,-15.474) -103.94,-15.474 ; R49.1@-104.157,-15.996 ccw(c-104.679,-15.474) -103.94,-15.474 ; R49.1@-104.157,-15.996 ccw(c-104.679,-15.474) -103.94,-15.474 ; -103.94,-15.474 ccw(c-103.202,-15.474) R49.1@-103.724,-15.996 ; -103.94,-15.474 ccw(c-103.202,-15.474) R49.1@-103.724,-15.996 ; -103.94,-15.474 ccw(c-103.202,-15.474) R49.1@-103.724,-15.996 ; -103.94,-15.474 ccw(c-103.202,-15.474) R49.1@-103.724,-15.996 ; -103.94,-15.474 ccw(c-103.202,-15.474) R49.1@-103.724,-15.996